# EAGLE board Proiect_OpenBook_Final_PCB (EAGLE 9.7.0)
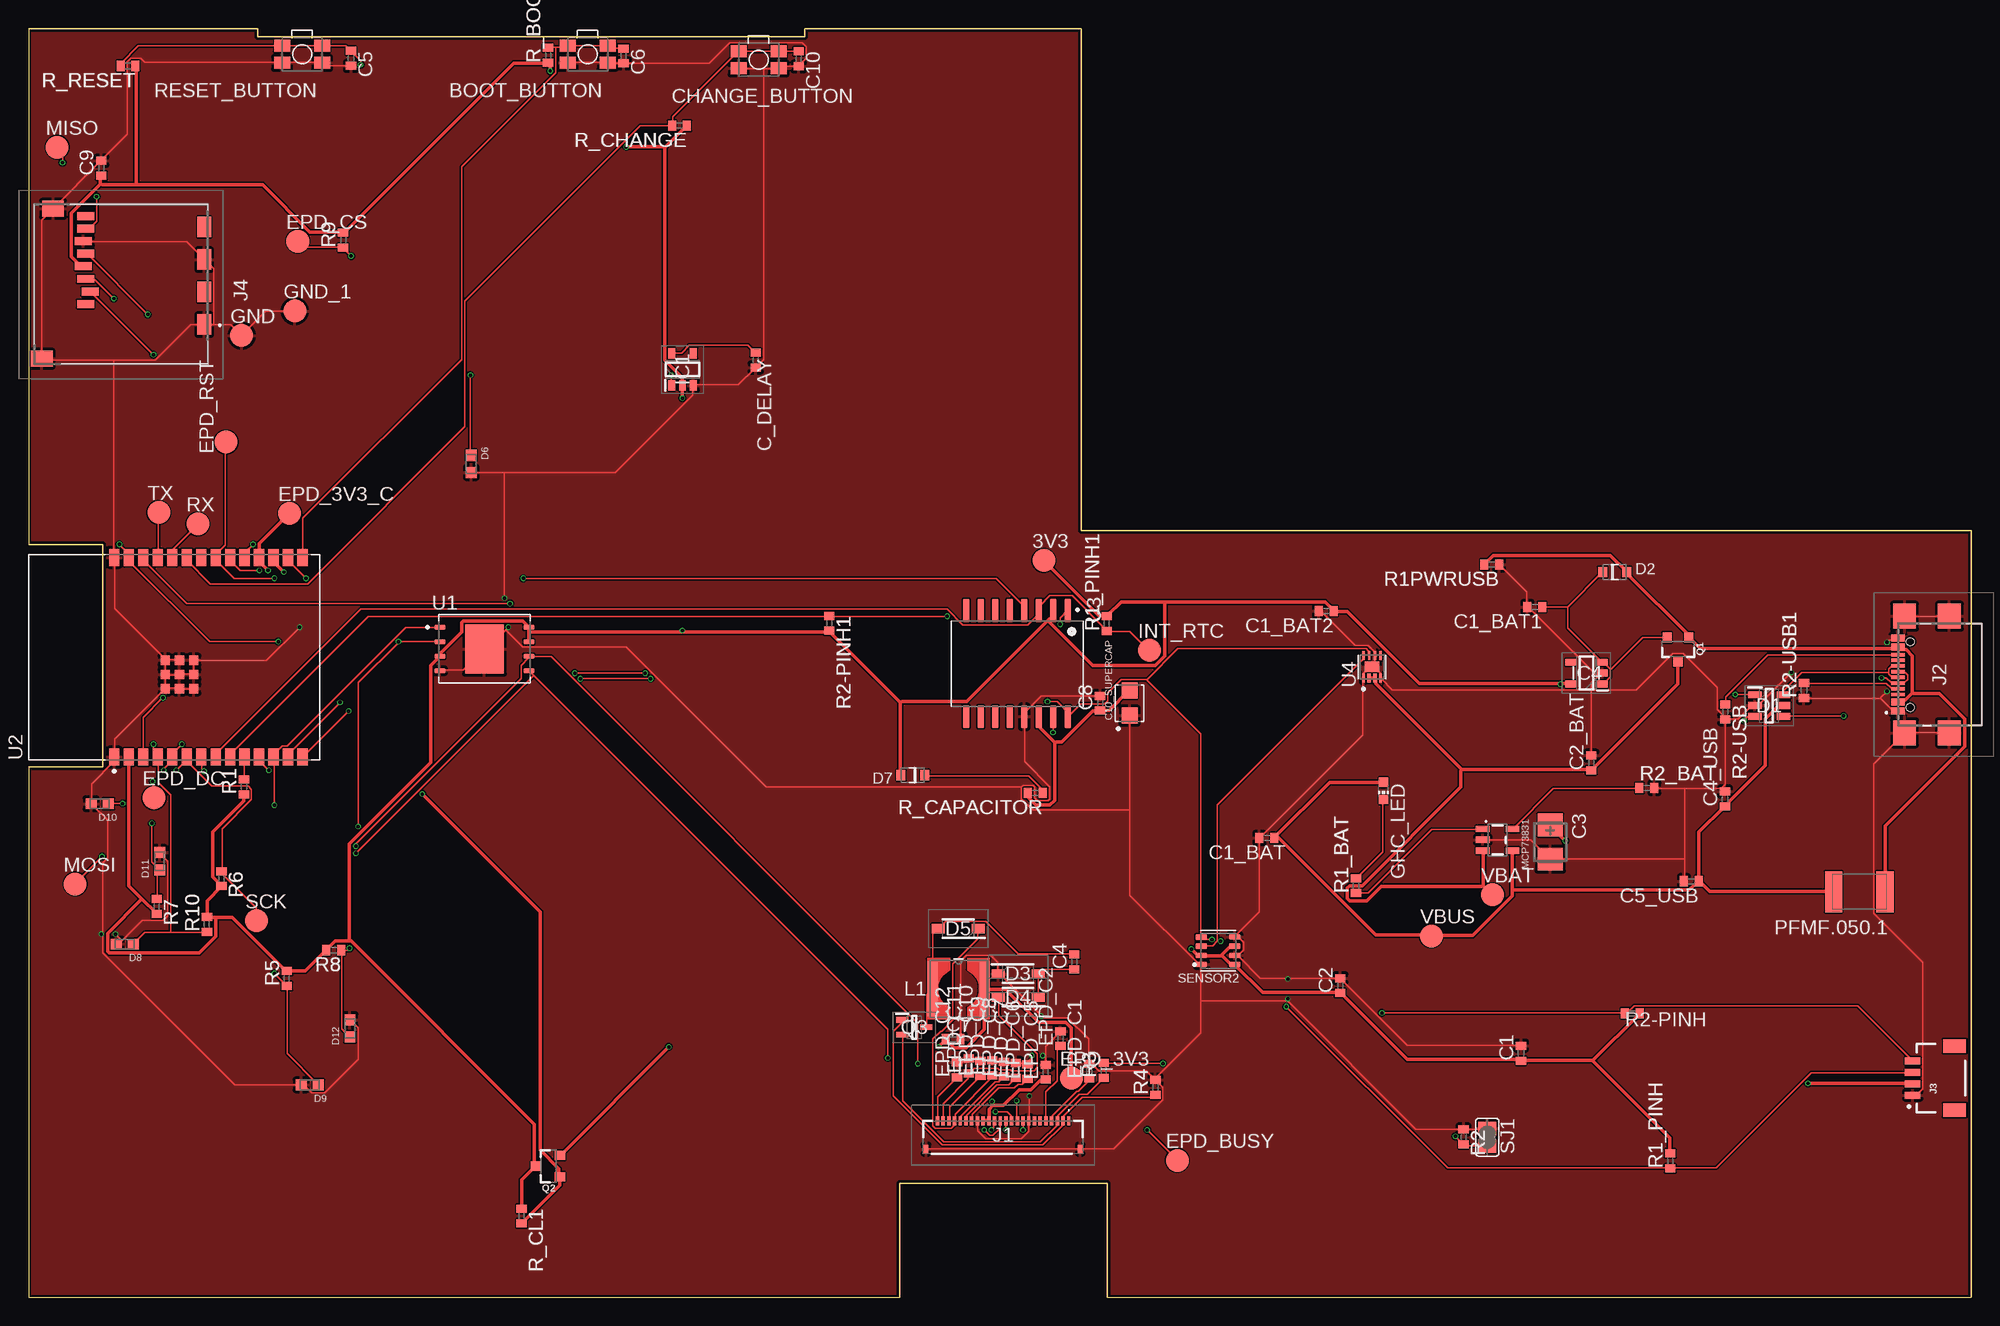
[diagram p0: board, top side]
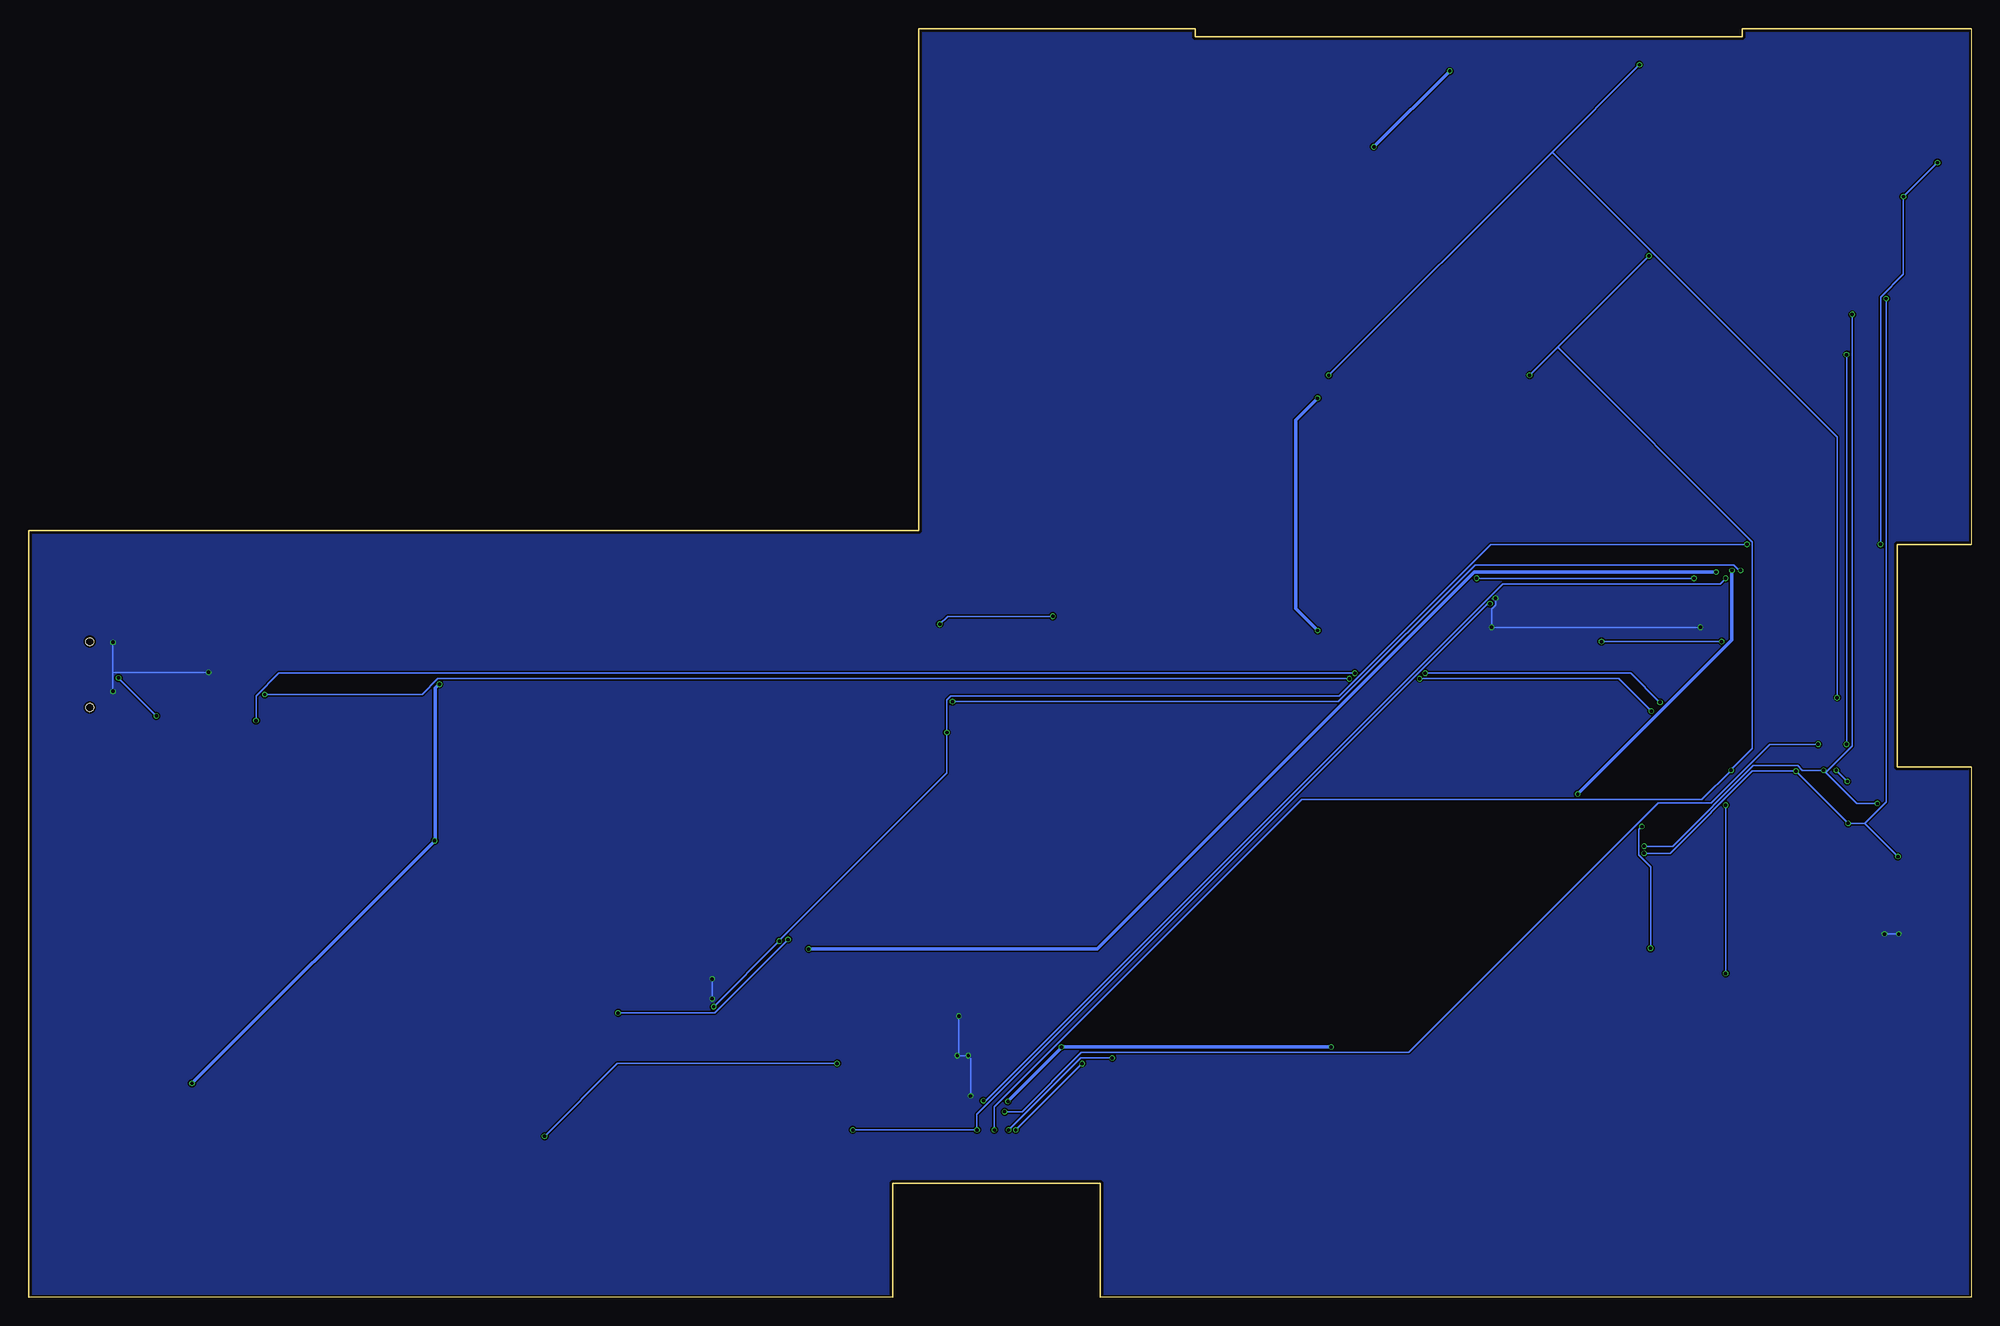
[diagram p1: board, bottom side, seen from below]

Size 170.2 x 111.2 mm. Coordinates in mm from the lower left corner, seen from the top.
Outline: 0,0 76.3,0 76.3,10 94.5,10 94.5,0 170.2,0 170.2,67.2 92.2,67.2 92.2,111.2 68,111.2 68,110.5 20.09,110.5 20.09,111.2 0,111.2 0,66 6.5,66 6.5,46.5 0,46.5 0,0
Copper layers (1*16): Top 0.035mm / dielectric 1.6mm / Bottom 0.035mm
Design rules "jlcpcb-2layers.dru": minimum track width 0.15mm, minimum drill 0.3mm, track to track 5mil, track to pad 5mil, pad to pad 5mil, via to via 5mil, smd to smd 5mil, copper to edge 0.2mm, drill to drill 6mil, minimum pad ring 10mil, minimum via ring 3mil, stop-mask expansion 4mil, vias tented up to drill 0mil, thermal gap 10mil
Net classes: 1 Trasee Putere: width 0.3 mm

## Footprints (pad centres in the part's own frame; a part is rotated, then mirrored left to right if it is on the bottom)
TP20R = smd 2 x 2: TP 0,0
MYBUTTON = smd 1.4 x 1.05: 1 1.75,0.75; 2 -1.75,0.75; 3 -1.75,-0.75; 4 1.75,-0.75
ESP32_WROVER_EAGLE-LTSPICE_C0402 = smd 0.7 x 0.9: 1 -0.65,0; 2 0.65,0
RCL_CT3528 = smd 2 x 2.2: + -1.5,0; - 1.5,0
CAPCP3225X100N = smd 1.4 x 1.4: 1 -1.1,0; 2 1.1,0
SOT95P280X145-6N = smd 1.2 x 0.6: 1 -1.25,0.95; 2 -1.25,0; 3 -1.25,-0.95; 4 1.25,-0.95; 5 1.25,0; 6 1.25,0.95
ESP32_WROVER_AVX---SD0805S020S1R0_AVX_SD0805S020S1R0_0 = smd 0.8 x 0.9: 1 -1.05,0; 2 1.05,0
SOD3716X135N = smd 1.15 x 0.8: 1 -1.75,0; 2 1.75,0
DIOC1608X36N = smd 0.97 x 0.94: 1 -0.75,0; 2 0.75,0
ADAFRUIT_CHIP-LED0603 = smd 0.8 x 0.8: A 0,-0.75; C 0,0.75
SOT95P280X125-5N = smd 0.9 x 0.6: 1 -1.4,0.95; 2 -1.4,0; 3 -1.4,-0.95; 4 1.4,-0.95; 5 1.4,0.95
SOT95P280X120-5N = smd 0.9 x 0.6: 1 -1.4,0.95; 2 -1.4,0; 3 -1.4,-0.95; 4 1.4,-0.95; 5 1.4,0.95
FH34SRJ24S05SH99 = smd 0.3 x 0.8: 1 5.75,1.45; 2 5.25,1.45; 3 4.75,1.45; 4 4.25,1.45; 5 3.75,1.45; 6 3.25,1.45; 7 2.75,1.45; 8 2.25,1.45; 9 1.75,1.45; 10 1.25,1.45; 11 0.75,1.45; 12 0.25,1.45; 13 -0.25,1.45; 14 -0.75,1.45; 15 -1.25,1.45; 16 -1.75,1.45; 17 -2.25,1.45; 18 -2.75,1.45; 19 -3.25,1.45; 20 -3.75,1.45; 21 -4.25,1.45; 22 -4.75,1.45; 23 -5.25,1.45; 24 -5.75,1.45 | smd 0.4 x 0.8: MP1 6.75,-1.05; MP2 -6.75,-1.05
SAMACSYS_PARTS_USB4110GFA = smd 0.3 x 1.15: A1 -3.35,3.678; A4 -2.55,3.678; A5 -1.25,3.678; A6 -0.25,3.678; A7 0.25,3.678; A8 1.25,3.678; A9 2.55,3.678; A12 3.35,3.678; B1 3.05,3.678; B4 2.25,3.678; B5 1.75,3.678; B6 0.75,3.678; B7 -0.75,3.678; B8 -1.75,3.678; B9 -2.25,3.678; B12 -3.05,3.678 | smd 2.18 x 2: MP1 -5.11,-0.827; MP2 5.11,-0.827; MP3 -5.11,3.103; MP4 5.11,3.103 | hole 0.65: -2.89,2.603; 2.89,2.603
JST04_1MM_RA = smd 0.6 x 1.35: 1 -1.5,0; 2 -0.5,0; 3 0.5,0; 4 1.5,0 | smd 1.2 x 2: NC1 2.8,-3.675; NC2 -2.8,-3.675
112ATAARR03ATTEND = smd 1.8 x 1.2: G1 10.6,10.4; G2 4.9,10.4; S1 7.75,10.4; S2 2.05,10.4 | smd 1.4 x 1.9: G3 13.6,-3.85; G4 0.45,-2.85 | smd 0.7 x 1.5: P1 8.8,0; P2 7.7,0.4; P3 6.6,0; P4 5.5,-0.2; P5 4.4,0; P6 3.3,-0.2; P7 2.2,0; P8 1.1,0
IND_4828-WE-TPC_WRE = smd 0.889 x 4.826: 1 -2.286,0; 2 2.286,0
ESP32_WROVER_SPARKFUN-IC-POWER_SOT23-5 = smd 0.55 x 1.2: 1 -0.95,-1.3; 2 0,-1.3; 3 0.95,-1.3; 4 0.95,1.3; 5 -0.95,1.3
ESP32C6_VARISTOR_CT/CN1812 = smd 1.5 x 3.6: 1 -2.25,0; 2 2.25,0
ESP32_WROVER_SPARKFUN-DISCRETESEMI_SOT23-3 = smd 0.8 x 0.9: 1 -0.95,-1; 2 0.95,-1; 3 0,1.1
SOT65P210X110-3N = smd 1.05 x 0.5: 1 -1.05,0.65; 2 -1.05,-0.65; 3 1.05,0
ESP32_WROVER_EAGLE-LTSPICE_R0402 = smd 0.7 x 0.9: 1 -0.65,0; 2 0.65,0
ESP32_WROVER_BME680_PSON80P300X300X100-8N = smd 1.016 x 0.5: 1 1.458,1.2; 2 1.458,0.4; 3 1.458,-0.4; 4 1.458,-1.2; 5 -1.458,-1.22; 6 -1.458,-0.4; 7 -1.458,0.4; 8 -1.458,1.2
SJ = smd 1.168 x 1.6: 1 -0.762,0; 2 0.762,0
SON127P600X800X80-9N = smd 0.94 x 0.44: 1 -3.895,1.905; 2 -3.895,0.635; 3 -3.895,-0.635; 4 -3.895,-1.905; 5 3.895,-1.905; 6 3.895,-0.635; 7 3.895,0.635; 8 3.895,1.905 | smd 3.4 x 4.3: 9 0,0
XCVR_ESP32-C6-WROOM-1-N8 = smd 1.5 x 0.9: 1 -8.75,5.26; 2 -8.75,3.99; 3 -8.75,2.72; 4 -8.75,1.45; 5 -8.75,0.18; 6 -8.75,-1.09; 7 -8.75,-2.36; 8 -8.75,-3.63; 9 -8.75,-4.9; 10 -8.75,-6.17; 11 -8.75,-7.44; 12 -8.75,-8.71; 13 -8.75,-9.98; 14 -8.75,-11.25; 15 8.75,-11.25; 16 8.75,-9.98; 17 8.75,-8.71; 18 8.75,-7.44; 19 8.75,-6.17; 20 8.75,-4.9; 21 8.75,-3.63; 22 8.75,-2.36; 23 8.75,-1.09; 24 8.75,0.18; 25 8.75,1.45; 26 8.75,2.72; 27 8.75,3.99; 28 8.75,5.26 | smd 0.8 x 0.8: 29_1 -2.755,0.79; 29_2 -1.505,0.79; 29_3 -0.255,0.79; 29_4 -2.755,-0.46; 29_5 -1.505,-0.46; 29_6 -0.255,-0.46; 29_7 -2.755,-1.71; 29_8 -1.505,-1.71; 29_9 -0.255,-1.71
SOIC127P1032X265-16N = smd 2.05 x 0.59: 1 -4.655,4.445; 2 -4.655,3.175; 3 -4.655,1.905; 4 -4.655,0.635; 5 -4.655,-0.635; 6 -4.655,-1.905; 7 -4.655,-3.175; 8 -4.655,-4.445; 9 4.655,-4.445; 10 4.655,-3.175; 11 4.655,-1.905; 12 4.655,-0.635; 13 4.655,0.635; 14 4.655,1.905; 15 4.655,3.175; 16 4.655,4.445
SON50P200X200X80-9N = smd 0.76 x 0.27: 1 -0.985,0.75; 4 -0.985,-0.75; 5 0.985,-0.75; 6 0.985,-0.25; 7 0.985,0.25; 8 0.985,0.75 | smd 0.813 x 0.406: 2 -0.985,0.25; 3 -0.985,-0.25 | smd 0.9 x 1.3: 9 0,0

## Placement (x,y rotation side)
3V3  TPTP20R  [TP20R]  88.94,64.58 0 top
BOOT_BUTTON  BUTTON_CUSYOMV1  [MYBUTTON]  48.98,108.95 180 top
C1  100nF  [ESP32_WROVER_EAGLE-LTSPICE_C0402]  130.74,21.41 90 top
C1_BAT  4.7uF  [ESP32_WROVER_EAGLE-LTSPICE_C0402]  108.48,40.26 180 top
C1_BAT1  4.7uF  [ESP32_WROVER_EAGLE-LTSPICE_C0402]  131.95,60.51 180 top
C1_BAT2  4.7uF  [ESP32_WROVER_EAGLE-LTSPICE_C0402]  113.69,60.15 180 top
C2  100nF  [ESP32_WROVER_EAGLE-LTSPICE_C0402]  114.91,27.32 90 top
C2_BAT  4.7uF  [ESP32_WROVER_EAGLE-LTSPICE_C0402]  136.89,46.84 90 top
C3  100uF  [RCL_CT3528]  133.3,39.91 270 top
C4  4.7uF/25V  [ESP32_WROVER_EAGLE-LTSPICE_C0402]  91.61,29.41 90 top
C4_USB  100nF  [ESP32_WROVER_EAGLE-LTSPICE_C0402]  148.61,43.68 90 top
C5  1uF  [ESP32_WROVER_EAGLE-LTSPICE_C0402]  28.25,108.58 270 top
C5_USB  4.7uF  [ESP32_WROVER_EAGLE-LTSPICE_C0402]  145.67,36.47 180 top
C6  100nF  [ESP32_WROVER_EAGLE-LTSPICE_C0402]  52.13,108.8 270 top
C7  10uF  [ESP32_WROVER_EAGLE-LTSPICE_C0402]  80.99,22.63 0 top
C8  100nF  [ESP32_WROVER_EAGLE-LTSPICE_C0402]  93.87,52.08 90 top
C9  100nF  [ESP32_WROVER_EAGLE-LTSPICE_C0402]  6.37,98.96 90 top
C10  100nF  [ESP32_WROVER_EAGLE-LTSPICE_C0402]  67.46,108.54 270 top
C10_SUPERCAP  CPH3225A  [CAPCP3225X100N]  96.46,52.09 90 top
C_DELAY  100nF  [ESP32_WROVER_EAGLE-LTSPICE_C0402]  63.7,82.14 270 top
CHANGE_BUTTON  BUTTON_CUSYOMV1  [MYBUTTON]  63.96,108.45 180 top
D1  USBLC6-2SC6Y  [SOT95P280X145-6N]  152.48,51.87 0 top
D2  ESP32_WROVER_AVX---SD0805S020S1R0_AVX_SD0805S020S1R0_0_0AVX_SD0805S020S1R0_0_0  [ESP32_WROVER_AVX---SD0805S020S1R0_AVX_SD0805S020S1R0_0]  138.94,63.57 0 top
D3  MBR0530  [SOD3716X135N]  86.69,28.37 0 top
D4  MBR0530  [SOD3716X135N]  86.69,26.32 180 top
D5  MBR0530  [SOD3716X135N]  81.44,32.32 180 top
D6  PGB1010603MR  [DIOC1608X36N]  38.78,73.05 270 top
D7  ESP32_WROVER_AVX---SD0805S020S1R0_AVX_SD0805S020S1R0_0_0AVX_SD0805S020S1R0_0_0  [ESP32_WROVER_AVX---SD0805S020S1R0_AVX_SD0805S020S1R0_0]  77.47,45.77 180 top
D8  PGB1010603MR  [DIOC1608X36N]  8.44,30.97 180 top
D9  PGB1010603MR  [DIOC1608X36N]  24.64,18.63 180 top
D10  PGB1010603MR  [DIOC1608X36N]  6.24,43.27 180 top
D11  PGB1010603MR  [DIOC1608X36N]  11.49,38.23 90 top
D12  PGB1010603MR  [DIOC1608X36N]  28.16,23.58 90 top
EPD_3V3  TPTP20R  [TP20R]  91.35,19.21 0 top
EPD_3V3_C  TPTP20R  [TP20R]  22.88,68.71 0 top
EPD_BUSY  TPTP20R  [TP20R]  100.63,12.01 0 top
EPD_C1  1uF/50V  [ESP32_WROVER_EAGLE-LTSPICE_C0402]  92.92,19.84 90 top
EPD_C2  1uF/50V  [ESP32_WROVER_EAGLE-LTSPICE_C0402]  90.4,22.68 90 top
EPD_C5  0.1uF/50V  [ESP32_WROVER_EAGLE-LTSPICE_C0402]  89.11,19.75 90 top
EPD_C6  1uF/50V  [ESP32_WROVER_EAGLE-LTSPICE_C0402]  87.5,19.79 90 top
EPD_C7  1uF/50V  [ESP32_WROVER_EAGLE-LTSPICE_C0402]  86.48,19.9 90 top
EPD_C8  1uF/50V  [ESP32_WROVER_EAGLE-LTSPICE_C0402]  85.45,20.01 90 top
EPD_C9  1uF/50V  [ESP32_WROVER_EAGLE-LTSPICE_C0402]  84.42,20.12 90 top
EPD_C10  1uF/50V  [ESP32_WROVER_EAGLE-LTSPICE_C0402]  83.39,20.07 90 top
EPD_C11  1uF/50V  [ESP32_WROVER_EAGLE-LTSPICE_C0402]  82.36,20.29 90 top
EPD_C12  1uF/50V  [ESP32_WROVER_EAGLE-LTSPICE_C0402]  81.34,19.95 90 top
EPD_CS  TPTP20R  [TP20R]  23.58,92.55 0 top
EPD_DC  TPTP20R  [TP20R]  10.99,43.79 0 top
EPD_RST  TPTP20R  [TP20R]  17.3,74.97 90 top
GHC_LED  [ADAFRUIT_CHIP-LED0603]  118.69,44.41 180 top
GND  TPTP20R  [TP20R]  18.67,84.29 0 top
GND_1  TPTP20R  [TP20R]  23.33,86.45 0 top
IC1  BD5229G-TR  [SOT95P280X125-5N]  57.29,81.33 90 top
IC4  XC6220A331MR-G  [SOT95P280X120-5N]  136.47,54.71 180 top
INT_RTC  TPTP20R  [TP20R]  98.18,56.71 0 top
J1  FH34SRJ-24S-0.5SH_99_  [FH34SRJ24S05SH99]  85.37,14.04 0 top
J2  SAMACSYS_PARTS_USB4110-GF-A  [SAMACSYS_PARTS_USB4110GFA]  167.44,54.59 90 top
J3  QWIIC_RIGHT_ANGLE  [JST04_1MM_RA]  165.04,19.22 90 top
J4  112A-TAAR-R03_ATTEND  [112ATAARR03ATTEND]  5,95.86 270 top
L1  68uH  [IND_4828-WE-TPC_WRE]  81.47,27.05 0 top
MCP73831  ESP32_WROVER_SPARKFUN-IC-POWER_MCP73831  [ESP32_WROVER_SPARKFUN-IC-POWER_SOT23-5]  128.69,40.11 270 top
MISO  TPTP20R  [TP20R]  2.51,100.79 0 top
MOSI  TPTP20R  [TP20R]  4.07,36.22 0 top
PFMF.050.1  ESP32C6_VARISTORCN1812  [ESP32C6_VARISTOR_CT/CN1812]  160.38,35.55 180 top
Q1  20V/4.2A/52mΩ/1.4W  [ESP32_WROVER_SPARKFUN-DISCRETESEMI_SOT23-3]  144.5,56.83 180 top
Q2  20V/4.2A/52mΩ/1.4W  [ESP32_WROVER_SPARKFUN-DISCRETESEMI_SOT23-3]  45.55,11.51 90 top
Q3  SI1308EDL-T1-GE3  [SOT65P210X110-3N]  77.59,23.68 0 top
R1  10K  [ESP32_WROVER_EAGLE-LTSPICE_R0402]  18.87,44.75 90 top
R1_BAT  200  [ESP32_WROVER_EAGLE-LTSPICE_R0402]  116.28,36.08 90 top
R1_PINH  10K  [ESP32_WROVER_EAGLE-LTSPICE_R0402]  143.81,11.97 90 top
R1_PINH1  10K  [ESP32_WROVER_EAGLE-LTSPICE_R0402]  94.46,59.06 90 top
R1PWRUSB  100K  [ESP32_WROVER_EAGLE-LTSPICE_R0402]  128.17,64.23 180 top
R2  2.2  [ESP32_WROVER_EAGLE-LTSPICE_R0402]  125.71,14.07 270 top
R2-PINH  10K  [ESP32_WROVER_EAGLE-LTSPICE_R0402]  140.49,24.9 0 top
R2-PINH1  10K  [ESP32_WROVER_EAGLE-LTSPICE_R0402]  70.14,59.08 270 top
R2-USB  5k1  [ESP32_WROVER_EAGLE-LTSPICE_R0402]  148.63,51.32 270 top
R2-USB1  5k1  [ESP32_WROVER_EAGLE-LTSPICE_R0402]  155.53,53.2 90 top
R2_BAT  2K  [ESP32_WROVER_EAGLE-LTSPICE_R0402]  141.77,44.65 0 top
R3  0.47  [ESP32_WROVER_EAGLE-LTSPICE_R0402]  94.18,19.91 90 top
R4  10K  [ESP32_WROVER_EAGLE-LTSPICE_R0402]  98.72,18.41 90 top
R5  10K  [ESP32_WROVER_EAGLE-LTSPICE_R0402]  22.62,27.95 90 top
R6  10K  [ESP32_WROVER_EAGLE-LTSPICE_R0402]  16.9,36.7 270 top
R7  10K  [ESP32_WROVER_EAGLE-LTSPICE_R0402]  11.23,34.26 270 top
R8  10K  [ESP32_WROVER_EAGLE-LTSPICE_R0402]  26.74,30.44 180 top
R9  10K  [ESP32_WROVER_EAGLE-LTSPICE_R0402]  27.56,92.65 90 top
R10  10K  [ESP32_WROVER_EAGLE-LTSPICE_R0402]  15.63,32.7 90 top
R_BOOT  10K  [ESP32_WROVER_EAGLE-LTSPICE_R0402]  45.51,108.85 90 top
R_CAPACITOR  15  [ESP32_WROVER_EAGLE-LTSPICE_R0402]  88.2,44.21 180 top
R_CHANGE  10K  [ESP32_WROVER_EAGLE-LTSPICE_R0402]  57.03,102.68 180 top
R_CL1  10K  [ESP32_WROVER_EAGLE-LTSPICE_R0402]  43.19,7.14 270 top
R_RESET  10K  [ESP32_WROVER_EAGLE-LTSPICE_R0402]  8.72,107.92 180 top
RESET_BUTTON  BUTTON_CUSYOMV1  [MYBUTTON]  23.97,108.95 180 top
RX  TPTP20R  [TP20R]  14.83,67.79 0 top
SCK  TPTP20R  [TP20R]  19.99,33 0 top
SENSOR2  ESP32_WROVER_BME680_BME680  [ESP32_WROVER_BME680_PSON80P300X300X100-8N]  104.2,30.38 180 top
SJ1  [SJ]  127.79,14.04 270 top
TX  TPTP20R  [TP20R]  11.41,68.79 0 top
U1  W25Q512JVEIQ  [SON127P600X800X80-9N]  39.94,56.83 0 top
U2  ESP32-C6-WROOM-1-N8  [XCVR_ESP32-C6-WROOM-1-N8]  12.76,56.1 90 top
U3  DS3231SN#  [SOIC127P1032X265-16N]  86.6,55.55 270 top
U4  MAX17048G+T10  [SON50P200X200X80-9N]  117.69,55.27 90 top
VBAT  TPTP20R  [TP20R]  128.25,35.29 0 top
VBUS  TPTP20R  [TP20R]  122.9,31.68 0 top

## Library data of the parts
3V3 BOOT_BUTTON CHANGE_BUTTON EPD_3V3 EPD_3V3_C EPD_BUSY EPD_CS EPD_DC EPD_RST GHC_LED GND GND_1 INT_RTC MISO MOSI PFMF.050.1 RESET_BUTTON RX SCK SJ1 TX VBAT VBUS = DeskAssistant v19 v1
C1 C1_BAT C1_BAT1 C1_BAT2 C2 C2_BAT C4 C4_USB C5 C5_USB C6-C10 C_DELAY EPD_C1 EPD_C2 EPD_C5-EPD_C12 = DeskAssistant v19 v1; SPICEMODEL: NONE; SPICEPREFIX: C
C3 = DeskAssistant v19 v1; SPICEPREFIX: C
C10_SUPERCAP = DeskAssistant v19 v1; AVAILABILITY: Not in stock; CHECK_PRICES: https://www.snapeda.com/parts/CPH3225A/Seiko+Instruments/view-part/?ref=eda; DESCRIPTION: 11 mF (EDLC) Supercapacitor 3.3 V 1210 (3225 Metric) - -; MF: Seiko Instruments; MP: CPH3225A; PACKAGE: 1210 Seiko; PRICE: None; PURCHASE-URL: https://www.snapeda.com/api/url_track_click_mouser/?unipart_id=562593&manufacturer=Seiko Instruments&part_name=CPH3225A&search_term=None; SNAPEDA_LINK: https://www.snapeda.com/parts/CPH3225A/Seiko+Instruments/view-part/?ref=snap
D1 = DeskAssistant v19 v1; AVAILABILITY: In Stock; CHECK_PRICES: https://www.snapeda.com/parts/USBLC6-2SC6Y/STMicroelectronics/view-part/?ref=eda; DESCRIPTION: 17V Clamp 5A (8/20µs) Ipp Tvs Diode Surface Mount SOT-23-6; MF: STMicroelectronics; MP: USBLC6-2SC6Y; PACKAGE: SOT-23-6 STMicroelectronics; PRICE: None; SNAPEDA_LINK: https://www.snapeda.com/parts/USBLC6-2SC6Y/STMicroelectronics/view-part/?ref=snap
D2 D7 = DeskAssistant v19 v1; CENTROID_NOT_SPECIFIED: No; DATASHEET: http://datasheets.avx.com/schottky.pdf; DIGIKEY_DESCRIPTION: DIODE SCHOTTKY 20V 1A 0805; DIGIKEY_PART_NUMBER: 478-7800-1-ND; LEAD_FREE: yes; MF: AVX; MOUSER_PART_NUMBER: 581-SD0805S020S1R0; PACKAGE: 0805 (2012 metric); PREFIX: D; ROHS: yes; TEMPERATURE_RANGE_HIGH: +125°C; TEMPERATURE_RANGE_LOW: -55°C
D3-D5 = DeskAssistant v19 v1; AVAILABILITY: In Stock; CHECK_PRICES: https://www.snapeda.com/parts/MBR0530/Onsemi/view-part/?ref=eda; DESCRIPTION: Diode Schottky 30 V 500mA Surface Mount SOD-123; MF: ON Semiconductor; MP: MBR0530; PACKAGE: SOD-123-2 ON Semiconductor; PRICE: None; PURCHASE-URL: https://www.snapeda.com/api/url_track_click_mouser/?unipart_id=179458&manufacturer=ON Semiconductor&part_name=MBR0530&search_term=None; SNAPEDA_LINK: https://www.snapeda.com/parts/MBR0530/Onsemi/view-part/?ref=snap
D6 D8-D12 = DeskAssistant v19 v1; AVAILABILITY: In Stock; CHECK_PRICES: https://www.snapeda.com/parts/PGB1010603MR/Littelfuse/view-part/?ref=eda; DESCRIPTION: 150V (Typ) Clamp - Ipp Tvs Diode Surface Mount 0603 (1608 Metric); MF: Littelfuse Inc.; MP: PGB1010603MR; PACKAGE: 0603 Littelfuse Inc.; PRICE: None; PURCHASE-URL: https://www.snapeda.com/api/url_track_click_mouser/?unipart_id=5659453&manufacturer=Littelfuse Inc.&part_name=PGB1010603MR&search_term=None; SNAPEDA_LINK: https://www.snapeda.com/parts/PGB1010603MR/Littelfuse/view-part/?ref=snap
IC1 = DeskAssistant v19 v1; DESCRIPTION: Voltage Detector with Adjustable Delay Time: CMOS processes are utilized to develop high precision, low current consumption CMOS reset ICs that allow arbitrary setting of the delay time. The extensive lineup includes both Nch Open Drain and CMOS output types in a wide range of detection voltages (from 2.3V to 6.0V, in 0.1V steps), enabling selection of the ideal solution based on customer requirements. In addition, the entire series is of course both lead-free and RoHS-compliant.; HEIGHT: 1.25mm; MANUFACTURER_NAME: ROHM Semiconductor; MANUFACTURER_PART_NUMBER: BD5229G-TR; MOUSER_PART_NUMBER: 755-BD5229G-TR; MOUSER_PRICE-STOCK: https://www.mouser.co.uk/ProductDetail/ROHM-Semiconductor/BD5229G-TR?qs=4kLU8WoGk0vvnhrrYwdszw%3D%3D
IC4 = DeskAssistant v19 v1; DESCRIPTION: LDO Voltage Regulators; HEIGHT: 1.2mm; MANUFACTURER_NAME: Torex; MANUFACTURER_PART_NUMBER: XC6220A331MR-G; MOUSER_PART_NUMBER: 865-XC6220A331MR-G; MOUSER_PRICE-STOCK: https://www.mouser.co.uk/ProductDetail/Torex-Semiconductor/XC6220A331MR-G?qs=AsjdqWjXhJ8ZSWznL1J0gg%3D%3D
J1 = DeskAssistant v19 v1; DESCRIPTION: 24 Position FFC, FPC Connector Contacts, Top and Bottom 0.020" (0.50mm) Surface Mount, Right Angle; HEIGHT: 1.1mm; MANUFACTURER_NAME: Hirose; MANUFACTURER_PART_NUMBER: FH34SRJ-24S-0.5SH(99); MOUSER_PART_NUMBER: 798-FH34SRJ24S05SH99; MOUSER_PRICE-STOCK: https://www.mouser.co.uk/ProductDetail/Hirose-Connector/FH34SRJ-24S-0.5SH99?qs=vcbW%252B4%252BSTIpKBl5ap9J8Fw%3D%3D
J2 = DeskAssistant v19 v1; DESCRIPTION: CONN USB 2.0 TYPE-C R/A SMT; HEIGHT: 3.26mm; MANUFACTURER_NAME: GCT (GLOBAL CONNECTOR TECHNOLOGY); MANUFACTURER_PART_NUMBER: USB4110-GF-A; MOUSER_PART_NUMBER: 640-USB4110-GF-A; MOUSER_PRICE-STOCK: https://www.mouser.co.uk/ProductDetail/GCT/USB4110-GF-A?qs=KUoIvG%2F9IlYiZvIXQjyJeA%3D%3D
J3 = DeskAssistant v19 v1; PROD_ID: CONN-13694
J4 = DeskAssistant v19 v1; DESCRIPTION: Micro SD Card Socket, Push-Push Type, Top Mount, SMT, H=1.83mm, 10u; HEIGHT: 1.9mm; MANUFACTURER_NAME: ATTEND; MANUFACTURER_PART_NUMBER: 112A-TAAR-R03 ATTEND
L1 = DeskAssistant v19 v1; COPYRIGHT: Copyright (C) 2024 Ultra Librarian. All rights reserved.; MANUFACTURER_PART_NUMBER: 744043680; MFR_NAME: Wurth Electronics
MCP73831 = DeskAssistant v19 v1; PROD_ID: IC-09995
Q1 Q2 = DeskAssistant v19 v1; PROD_ID: TRAN-14388
Q3 = DeskAssistant v19 v1; AVAILABILITY: In Stock; CHECK_PRICES: https://www.snapeda.com/parts/SI1308EDL-T1-GE3/Vishay+Siliconix/view-part/?ref=eda; DESCRIPTION: Si1308EDL-T1-GE3 N-channel MOSFET Transistor, 1.5 A, 30 V, 3-Pin SC-70 | Siliconix / Vishay SI1308EDL-T1-GE3; MF: Vishay Siliconix; MP: SI1308EDL-T1-GE3; PACKAGE: SOT-323 Vishay Semiconductor; PRICE: None; PURCHASE-URL: https://www.snapeda.com/api/url_track_click_mouser/?unipart_id=274603&manufacturer=Vishay Siliconix&part_name=SI1308EDL-T1-GE3&search_term=None; SNAPEDA_LINK: https://www.snapeda.com/parts/SI1308EDL-T1-GE3/Vishay+Siliconix/view-part/?ref=snap
R1 R1_BAT R1_PINH R1_PINH1 R1PWRUSB R2 R2-PINH R2-PINH1 R2-USB R2-USB1 R2_BAT R3-R10 R_BOOT R_CAPACITOR R_CHANGE R_CL1 R_RESET = DeskAssistant v19 v1; SPICEMODEL: NONE; SPICEPREFIX: R
SENSOR2 = DeskAssistant v19 v1; AVAILABILITY: Unavailable; DESCRIPTION: Integrated Environmental Unit; MF: Bosch Sensortec; MP: BME680; PACKAGE: LGA-8 Bosch Tools; PRICE: None
U1 = DeskAssistant v19 v1; AVAILABILITY: In Stock; CHECK_PRICES: https://www.snapeda.com/parts/W25Q512JVEIQ/Winbond+Electronics/view-part/?ref=eda; DESCRIPTION: FLASH - NOR Memory IC 512Mb (64M x 8) SPI - Quad I/O 133 MHz 8-WSON (8x6); MF: Winbond Electronics; MP: W25Q512JVEIQ; PACKAGE: Package; PRICE: None; SNAPEDA_LINK: https://www.snapeda.com/parts/W25Q512JVEIQ/Winbond+Electronics/view-part/?ref=snap
U2 = DeskAssistant v19 v1; AVAILABILITY: In Stock; CHECK_PRICES: https://www.snapeda.com/parts/ESP32-C6-WROOM-1-N8/Espressif+Systems/view-part/?ref=eda; DESCRIPTION: Multiprotocol Modules ESP32-C6 module, Wi-Fi 6 in 2.4 GHz band, Bluetooth 5, Zigbee 3.0 and Thread. ESP34-WROOM Compatible - ENGINEERING SAMPLE; MF: Espressif Systems; MP: ESP32-C6-WROOM-1-N8; PACKAGE: None; PRICE: None; SNAPEDA_LINK: https://www.snapeda.com/parts/ESP32-C6-WROOM-1-N8/Espressif+Systems/view-part/?ref=snap
U3 = DeskAssistant v19 v1; AVAILABILITY: In Stock; CHECK_PRICES: https://www.snapeda.com/parts/DS3231SN%23/Analog+Devices/view-part/?ref=eda; DESCRIPTION: Extremely Accurate I²C-Integrated RTC/TCXO/Crystal; MF: Analog Devices; MP: DS3231SN#; PACKAGE: SOIC-16 Maxim; PRICE: None; PURCHASE-URL: https://www.snapeda.com/api/url_track_click_mouser/?unipart_id=99048&manufacturer=Analog Devices&part_name=DS3231SN#&search_term=None; SNAPEDA_LINK: https://www.snapeda.com/parts/DS3231SN%23/Analog+Devices/view-part/?ref=snap
U4 = DeskAssistant v19 v1; AVAILABILITY: In Stock; CHECK_PRICES: https://www.snapeda.com/parts/MAX17048G+T10/Analog+Devices/view-part/?ref=eda; DESCRIPTION: 3µA 1-Cell/2-Cell Fuel Gauge with ModelGauge; MF: Analog Devices; MP: MAX17048G+T10; PACKAGE: TDFN-8 Maxim; PRICE: None; PURCHASE-URL: https://www.snapeda.com/api/url_track_click_mouser/?unipart_id=329239&manufacturer=Analog Devices&part_name=MAX17048G+T10&search_term=None; SNAPEDA_LINK: https://www.snapeda.com/parts/MAX17048G+T10/Analog+Devices/view-part/?ref=snap

## Nets
3V3 [Trasee Putere]: 3V3.TP C1_BAT2.1 C3.+ C9.1 D7.2 IC1.2 IC4.5 J3.2 J4.P4 Q2.3 R1.1 R1_PINH1.2 R2-PINH1.2 R5.2 R6.2 R7.2 R8.2 R9.2 R10.2 R_BOOT.1 R_CHANGE.1 R_CL1.1 R_RESET.1 U1.3 U1.7 U1.8 U2.2 U3.2
32KHZ: R2-PINH1.1 U2.9 U3.1
DN: D1.4 J2.A7 J2.B7
DP: D1.6 J2.A6 J2.B6
EPD_3V3 [Trasee Putere]: C7.1 EPD_3V3.TP EPD_C5.1 J1.15 J1.16 L1.2 Q2.2
EPD_3V3_C [Trasee Putere]: EPD_3V3_C.TP Q2.1 R_CL1.2 U2.18
EPD_BUSY: EPD_BUSY.TP J1.9 U2.26
EPD_CS: D6.1 EPD_CS.TP J1.12 R9.1 U2.11
EPD_DC: EPD_DC.TP J1.11 U2.5
EPD_RST: EPD_RST.TP J1.10 U2.21
FLASH_CS: D9.1 R5.1 U1.1 U2.12
GDR: J1.2 Q3.1 R4.1
GND: BOOT_BUTTON.1 BOOT_BUTTON.2 C1.2 C1_BAT1.2 C1_BAT2.2 C1_BAT.2 C2.2 C2_BAT.2 C3.- C4_USB.2 C5.2 C5_USB.2 C6.2 C7.2 C8.2 C9.2 C10.2 C10_SUPERCAP.1 C_DELAY.2 CHANGE_BUTTON.1 CHANGE_BUTTON.2 D1.2 D3.1 D6.2 D8.2 D9.2 D10.2 D11.2 D12.2 EPD_C1.2 EPD_C2.2 EPD_C5.2 EPD_C6.2 EPD_C7.2 EPD_C8.2 EPD_C9.2 EPD_C10.2 EPD_C11.2 EPD_C12.2 GND.TP GND_1.TP IC1.3 IC4.2 J1.8 J1.17 J1.MP1 J1.MP2 J2.A1 J2.A12 J2.B1 J2.B12 J2.MP1 J2.MP2 J2.MP3 J2.MP4 J3.1 J4.G1 J4.G2 J4.G3 J4.G4 J4.P6 MCP73831.2 R1PWRUSB.1 R2-USB1.1 R2-USB.2 R2.1 R2_BAT.2 R4.2 RESET_BUTTON.1 RESET_BUTTON.2 SENSOR2.1 SENSOR2.5 SENSOR2.7 SJ1.1 U1.4 U1.9 U2.1 U2.28 U2.29_1 U2.29_2 U2.29_3 U2.29_4 U2.29_5 U2.29_6 U2.29_7 U2.29_8 U2.29_9 U3.13 U4.1 U4.4 U4.6 U4.9
GPIO8: R1.2 U2.10
I2C_PW [Trasee Putere]: C1.1 C2.1 R1_PINH.2 R2-PINH.2 SENSOR2.2 SENSOR2.6 SENSOR2.8 U2.17
INT_RTC: INT_RTC.TP R1_PINH1.1 U2.8 U3.3
IO/BOOT: BOOT_BUTTON.3 BOOT_BUTTON.4 C6.1 R_BOOT.2 U2.15
IO/CHANGE: C10.1 CHANGE_BUTTON.3 CHANGE_BUTTON.4 R_CHANGE.2 U2.23
MISO: D12.1 J4.P7 MISO.TP R8.1 U1.2 U2.27
MOSI: D11.1 J1.14 J4.P3 MOSI.TP R7.1 U1.5 U2.7
N$2: J2.B5 R2-USB.1
N$3: J2.A5 R2-USB1.2
N$4: C1_BAT1.1 D2.1 IC4.1 IC4.3 Q1.2
N$5: EPD_C12.1 J1.24
N$6: GHC_LED.C R1_BAT.2
N$7: C4.1 D3.2 D4.1
N$9: MCP73831.1 R1_BAT.1
N$10: MCP73831.5 R2_BAT.1
N$11: C_DELAY.1 IC1.5
N$12: EPD_C10.1 J1.22
N$14: EPD_C8.1 J1.20
N$15: EPD_C7.1 J1.19
N$16: EPD_C6.1 J1.18
N$18: EPD_C1.1 J1.4
N$19: EPD_C2.1 J1.5
N$24: D7.1 R_CAPACITOR.1
PREVGH: D5.1 EPD_C9.1 J1.21
PREVGL: D4.2 EPD_C11.1 J1.23
RESE: J1.3 Q3.2 R3.1
RESE': R2.2 R3.2 SJ1.2
RESET: C5.1 IC1.1 R_RESET.2 RESET_BUTTON.3 RESET_BUTTON.4 U2.3
RTC_RST: U2.16 U3.4
RX: RX.TP U2.24
SCK: D10.1 J1.13 J4.P5 R6.1 SCK.TP U1.6 U2.6
SCL: J3.4 R2-PINH.1 SENSOR2.4 U2.20 U3.16 U4.7
SDA: J3.3 R1_PINH.1 SENSOR2.3 U2.19 U3.15 U4.8
SRC: C4.2 D5.2 L1.1 Q3.3
SS_SD: D8.1 J4.P2 R10.1 U2.4
TX: TX.TP U2.25
USB_D+: D1.1 U2.14
USB_D-: D1.3 U2.13
VBAT [Trasee Putere]: C2_BAT.1 MCP73831.3 Q1.3 U4.2 U4.3 VBAT.TP
VBUS [Trasee Putere]: C1_BAT.1 C4_USB.1 C5_USB.1 D1.5 GHC_LED.A MCP73831.4 PFMF.050.1.2 VBUS.TP
VRTC [Trasee Putere]: C8.1 C10_SUPERCAP.2 R_CAPACITOR.2 U3.14
VUSB [Trasee Putere]: D2.2 J2.A4 J2.A9 J2.B4 J2.B9 PFMF.050.1.1 Q1.1 R1PWRUSB.2

## Tracks (layer width: path | path; a pad name or v marks a point on that pad's centre or on a via)
3V3  (via drill 0.3)
  Top 0.3: 55.75,100.76 55.75,82.13 57.27,80.61 57.27,79.98 IC1.2 57.27,79.78 v57.27,78.81 | 55.75,100.76 57.62,102.63 R_CHANGE.1 | 6.3,97.57 6.3,98.27 C9.1 | 6.3,97.57 3.74,95.01 3.74,91.2 4.57,90.37 4.78,90.37 J4.P4 | 9.42,97.5 6.44,97.5 6.3,97.57 | 9.42,97.5 20.5,97.5 24.65,93.35 27.49,93.35 R9.2 27.7,93.35 42.52,108.17 45.5,108.17 R_BOOT.1 45.57,108.03 45.7,107.89 v45.7,107.48 | 9.42,97.5 9.42,107.89 R_RESET.1 | v52.35,100.83 55.61,100.83 55.75,100.76 | 9.94,34.94 8.79,36.08 8.79,47.3 U2.2 | 9.94,34.94 11.22,33.66 R7.2 | R1.1 18.84,44.04 18.84,43.49 16.14,40.79 16.14,36.84 16.83,36.15 R6.2 16.9,36.01 15.65,34.76 15.65,33.38 R10.2 15.79,33.31 16.41,33.31 | R_CL1.1 43.21,7.83 43.21,10.32 44.39,11.49 Q2.3 44.32,11.63 44.32,15.17 28.25,31.23 28.12,31.23 | 28.12,31.23 26.87,31.23 26.18,30.54 R8.2 26.04,30.4 24.24,28.6 22.64,28.6 R5.2 22.51,28.67 17.87,33.31 16.41,33.31 | 9.94,34.94 6.92,31.92 6.92,30.33 7.06,30.19 14.96,30.19 16.41,31.65 16.41,33.31 | 43.84,58.31 43.84,58.59 U1.8 43.77,58.79 43.28,59.28 38.09,59.28 37.95,59.14 37.95,58.31 36.08,56.44 36.08,56.23 U1.3 35.94,56.09 35.25,55.4 35.25,46.88 28.12,39.75 28.12,31.23 | 43.84,58.31 43.84,57.48 U1.7 | 76.38,52.15 76.38,45.77 D7.2 | 76.38,52.15 70.15,58.38 R2-PINH1.2 70.01,58.31 57.27,58.31 | 89.3,59.31 82.2,52.22 76.52,52.22 76.38,52.15 | 89.3,59.31 89.75,59.76 89.75,60.18 U3.2 | 57.27,58.31 43.84,58.31 | v155.88,18.77 165.02,18.77 J3.2 | v134.62,40.03 133.31,41.34 C3.+ | 3V3.TP 88.99,64.54 93.76,59.76 94.46,59.76 R1_PINH1.2 94.6,59.83 95.7,60.94 99.51,60.94 | 99.51,60.94 113.57,60.94 114.33,60.18 C1_BAT2.1 114.47,60.11 115.51,60.11 121.81,53.81 134.21,53.81
  Top 0.3: 134.21,53.81 135.04,53.81 IC4.5 | v134.21,53.74 134.21,53.81 | 89.3,59.31 93.21,55.4 98.68,55.4 99.51,56.23 99.51,60.94 | v57.27,58.45 57.27,58.31
  Bottom 0.3: v45.7,107.48 v52.35,100.83 | v155.88,18.77 v134.62,40.03 134.55,40.16 134.55,53.39 v134.21,53.74 | v57.27,58.45 59.2,60.37 59.2,76.88 v57.27,78.81
32KHZ  (via drill 0.3)
  Top 0.15: v80.47,59.69 70.15,59.69 R2-PINH1.1 70.08,59.69 29.78,59.69 17.73,47.64 17.73,47.37 U2.9 | v90.37,59 90.37,59.55 91,60.18 U3.1
  Bottom 0.15: v80.47,59.69 89.68,59.69 v90.37,59
DN  (via drill 0.3)
  Top 0.15: J2.A7 163.78,54.78 164.4,54.78 164.61,54.57 164.61,54.15 164.33,53.88 163.78,53.88 J2.B7 163.71,53.88 163.15,53.88 162.74,54.29 v162.32,54.29 | v159,50.97 153.74,50.97 D1.4
  Bottom 0.15: v162.32,54.29 v159,50.97
DP
  Top 0.15: 162.94,54.78 162.94,55.05 163.22,55.33 163.71,55.33 J2.B6 | 162.94,54.78 162.94,54.64 163.22,54.36 163.71,54.36 J2.A6 | 162.94,54.78 155.33,54.78 153.74,53.18 153.74,52.84 D1.6
EPD_3V3  (via drill 0.3)
  Top 0.3: EPD_3V3.TP 91.34,19.25 91.34,23.61 90.86,24.1 88.5,24.1 85.8,26.8 85.8,26.87 85.66,27.01 83.79,27.01 L1.2 83.72,26.87 83.72,23.48 82.13,21.88 81.09,21.88 80.47,22.51 C7.1 80.33,22.58 v79.71,21.95 | J1.16 83.65,15.51 84.07,15.51 J1.15 84.14,15.65 84.14,16.48 84.48,16.83 | 84.48,16.83 85.39,16.83 86.77,18.21 87.81,18.21 88.64,19.04 89.06,19.04 EPD_C5.1 | v56.09,21.95 46.6,12.46 Q2.2 | v84.42,17.17 84.42,16.97 84.48,16.83
  Bottom 0.3: v56.09,21.95 v79.71,21.95 79.78,21.81 v84.42,17.17
EPD_3V3_C  (via drill 0.3)
  Top 0.3: R_CL1.2 43.21,6.51 46.54,9.83 46.54,10.53 Q2.1 46.47,10.66 46.47,11.29 44.8,12.95 44.8,33.79 v34.49,44.11 | EPD_3V3_C.TP 22.85,68.7 20.22,66.06 20.22,64.89 U2.18 20.29,64.75 20.29,64.4 v20.98,63.71
  Bottom 0.3: v34.49,44.11 20.98,57.62 v20.98,63.71
EPD_BUSY  (via drill 0.3)
  Top 0.15: v87.12,14.68 87.12,15.44 J1.9 | v97.99,14.68 100.62,12.05 EPD_BUSY.TP | v42.17,60.8 13.85,60.8 10.04,64.61 10.04,64.82 U2.26
  Bottom 0.15: v97.99,14.68 v87.12,14.68 87.12,16.07 42.38,60.8 v42.17,60.8
EPD_CS  (via drill 0.3)
  Top 0.15: EPD_CS.TP 23.61,92.52 24.1,92.03 27.49,92.03 R9.1 27.56,91.96 v28.25,91.27 | v38.71,80.81 38.71,73.82 D6.1 | v85.59,14.68 85.59,15.44 J1.12 | v21.05,46.19 20.22,47.02 20.22,47.3 U2.11
  Bottom 0.15: v28.25,91.27 36.25,83.27 | 36.25,83.27 v38.71,80.81 | v85.59,14.68 85.59,16.69 58.66,43.63 23.61,43.63 v21.05,46.19 21.05,46.26 19.18,48.13 19.18,66.2 36.25,83.27
EPD_DC  (via drill 0.3)
  Top 0.15: v84.69,16.27 85.73,16.27 86.08,15.93 86.08,15.51 J1.11 | v13.43,48.48 12.6,47.64 12.6,47.37 U2.5 12.53,47.3 12.53,47.02 11.84,46.33 v11.84,46.19 | v10.87,45.22 10.94,45.15 10.94,43.84 EPD_DC.TP
  Bottom 0.15: v84.69,16.27 83.17,16.27 77.97,21.47 49.31,21.47 27.42,43.35 22.78,43.35 17.66,48.48 v13.43,48.48 | v11.84,46.19 v10.87,45.22
EPD_RST  (via drill 0.3)
  Top 0.15: v86.56,17.24 86.56,15.51 J1.10 | v21.54,63.02 18,63.02 16.41,64.61 16.41,64.82 U2.21 16.41,64.89 16.41,65.09 17.24,65.93 17.24,74.93 EPD_RST.TP
  Bottom 0.15: v86.56,17.24 86.36,17.24 41.06,62.53 22.02,62.53 v21.54,63.02
FLASH_CS  (via drill 0.3)
  Top 0.15: D9.1 25.35,18.7 22.64,21.4 22.64,27.29 R5.1 22.58,27.35 v21.54,28.39 | U1.1 36.01,58.72 33.03,58.72 22.64,48.34 22.23,48.34 21.54,47.64 21.54,47.37 U2.12 21.54,47.3 v21.54,43.14
  Bottom 0.15: v21.54,43.14 v21.54,28.39
GDR
  Top 0.15: R4.1 98.68,17.73 98.47,17.52 92.31,17.52 90.65,15.86 90.65,15.51 J1.2 90.58,15.44 90.58,15.1 88.85,13.37 80.05,13.37 75.76,17.66 75.76,23.34 76.52,24.1 76.52,24.31 Q3.1
GND  (via drill 0.3)
  Top 0.15: J1.17 83.17,15.44 83.17,14.61 83.86,13.92 86.98,13.92 87.6,14.54 87.6,15.44 J1.8 87.67,15.51 v87.67,17.66 | 89.12,21.19 89.12,22.02 90.37,23.27 EPD_C2.2 | 89.12,21.19 89.12,20.43 EPD_C5.2 | EPD_C12.2 81.37,20.64 82.06,20.64 82.34,20.91 EPD_C11.2 82.41,20.91 83.24,20.91 83.38,20.77 EPD_C10.2 83.45,20.77 EPD_C9.2 84.48,20.71 85.39,20.71 EPD_C8.2 85.52,20.64 85.59,20.57 86.42,20.57 EPD_C7.2 86.49,20.5 87.46,20.5 EPD_C6.2 87.46,20.57 87.88,20.98 v87.88,21.19 | v88.85,21.19 89.12,21.19 | J1.MP2 78.67,13.02 92.1,13.02 J1.MP1 92.17,13.02 95.08,13.02 99.37,17.31 99.37,18.42 98.75,19.04 R4.2 | C7.2 81.65,22.64 81.65,29.5 82.13,29.98 84.28,29.98 84.9,29.36 84.9,28.39 D3.1 84.97,28.32 85.11,28.32 88.74,24.69 | C8.2 93.83,52.7 88.71,52.7 87.25,51.24 87.25,50.9 U3.13 87.25,50.83 87.25,46.95 89.47,44.74 89.47,43.7 89.33,43.56 88.36,43.56 88.16,43.77 88.16,44.74 88.02,44.87 87.12,44.87 86.98,44.74 | SJ1.1 127.77,14.75 125.76,14.75 R2.1 125.69,14.75 121.53,14.75 110.31,25.97 | R4.2 98.68,19.11 97.92,19.88 93.76,19.88 93.21,20.43 92.93,20.43 EPD_C1.2 92.86,20.5 92.86,22.64 91,24.52 88.92,24.52 88.74,24.69 | 102.7,25.97 102.7,23.2 98.68,19.18 R4.2 | 102.7,25.97 102.7,29.15 SENSOR2.1 102.63,29.09 96.47,35.25 96.47,42.73 | 96.47,42.73 96.47,50.97 C10_SUPERCAP.1 | 102.7,25.97 110.31,25.97 | 86.98,44.74 86.98,43.7 87.95,42.73 96.47,42.73 | v88.71,24.65 88.74,24.69 | J2.MP2 168.21,59.69 164.4,59.69 J2.MP4 163.78,59.14 163.78,57.96 J2.A12 163.78,57.89 163.78,57.69 J2.B1 163.71,57.62 163.01,57.62 v162.81,57.41 | 162.25,52.49 155.54,52.49 R2-USB1.1 | 162.25,52.49 163.15,51.59 163.71,51.59 J2.B12 163.78,51.52 163.78,51.24 J2.A1 163.78,51.18 163.78,50.21 164.4,49.58 J2.MP3
  Top 0.15: v162.81,53.12 162.25,52.56 162.25,52.49 | J3.1 165.09,17.73 165.37,17.73 165.92,18.28 165.92,29.36 161.63,33.66 161.63,46.74 164.33,49.44 J2.MP3 | J2.MP1 168.21,49.51 164.4,49.51 J2.MP3 | R1PWRUSB.1 128.87,64.19 131.23,61.84 131.23,60.52 C1_BAT1.2 131.37,60.52 137.46,54.43 | 136.91,53.25 136.91,53.88 137.46,54.43 | 136.91,53.25 136.91,47.51 C2_BAT.2 | 137.46,54.43 137.81,54.78 IC4.2 137.46,54.43 | MCP73831.2 127.42,40.1 131.57,40.1 133.24,38.43 C3.- 133.31,38.43 145.08,38.43 | R2-USB.2 148.68,50.69 149.79,50.69 150.97,51.87 151.17,51.87 D1.2 151.24,51.94 151.59,51.94 v154.43,54.78 | 145.08,44.6 148.33,44.6 148.54,44.39 C4_USB.2 148.33,44.67 148.61,44.94 148.61,50.62 R2-USB.2 | 145.08,44.6 142.45,44.6 R2_BAT.2 | 145.08,44.6 145.08,38.43 | 145.08,38.43 145.08,36.49 C5_USB.2 | 136.91,53.25 140.85,53.25 144.04,56.44 144.94,56.44 147.92,53.46 147.92,51.52 148.68,50.76 R2-USB.2 | U4.9 117.66,55.26 117.52,55.26 116.96,54.71 116.96,54.29 U4.1 116.89,54.22 116.89,49.31 107.89,40.3 C1_BAT.2 107.82,40.23 107.82,33.79 105.67,31.65 SENSOR2.5 105.81,31.72 106.44,31.09 106.44,30.47 105.95,29.98 SENSOR2.7 105.67,29.92 105.95,29.92 107.89,27.98 110.31,27.98 | U4.9 117.72,55.26 117.86,55.26 118.42,54.71 118.42,54.29 U4.4 118.49,54.22 119.46,53.25 136.91,53.25 | U4.9 117.93,55.26 117.93,56.23 U4.6 117.93,56.3 117.93,56.58 117.38,57.13 116.2,57.13 113.22,60.11 113.08,60.11 C1_BAT2.2 | 110.31,27.98 114.89,27.98 C2.2 114.95,27.91 120.77,22.09 130.68,22.09 C1.2 | v110.31,26.18 110.31,25.97 | v110.31,27.91 110.31,27.98 | BOOT_BUTTON.1 47.3,108.24 50.69,108.24 BOOT_BUTTON.2 50.76,108.17 52.08,108.17 C6.2 52.15,108.17 59.62,108.17 61.42,109.97 67.8,109.97 68.14,109.62 68.14,108.58 67.52,107.96 C10.2 65.86,107.89 65.72,107.75 CHANGE_BUTTON.2 65.65,107.68 64.4,107.68
  Top 0.15: 64.4,107.68 62.26,107.68 CHANGE_BUTTON.1 | U1.4 36.08,54.98 38.09,54.98 39.89,56.78 U1.9 39.96,56.85 40.16,56.85 41.79,58.48 | 41.69,72.3 51.38,72.3 58.17,79.08 58.17,79.92 IC1.3 58.24,79.98 62.19,79.98 63.64,81.44 C_DELAY.2 63.71,81.51 64.4,82.2 64.4,107.68 | 41.69,72.3 D6.2 | v42.03,58.72 41.79,58.48 | 41.69,72.3 v41.69,61.29 | 16.2,85.25 17.73,85.25 18.63,84.35 GND.TP 18.7,84.35 20.77,86.42 23.27,86.42 GND_1.TP | 16.2,85.25 15.44,85.25 J4.G1 15.37,85.25 14.2,85.25 11.08,82.13 7.48,82.13 | J4.P6 4.85,92.52 13.85,92.52 15.37,91 J4.G2 15.44,90.92 16.2,90.16 16.2,85.25 | C5.2 28.18,107.96 25.97,107.96 25.76,108.17 RESET_BUTTON.2 25.69,108.24 22.23,108.24 RESET_BUTTON.1 22.16,108.24 10.18,108.24 9.83,108.58 8.93,108.58 8.66,108.31 8.66,101.94 6.37,99.65 C9.2 6.3,99.58 2.15,95.43 J4.G4 2.15,95.36 1.18,94.39 1.18,82.27 J4.G3 1.25,82.27 1.39,82.13 7.48,82.13 | D11.2 11.49,38.92 12.19,38.23 12.19,33.45 11.77,33.03 9.97,33.03 7.96,31.02 7.76,31.02 D8.2 8.17,31.3 v7.62,31.86 | D12.2 28.18,24.31 28.88,23.61 28.88,20.84 25.97,17.94 24.79,17.94 24.1,18.63 23.96,18.63 D9.2 23.82,18.63 18.07,18.63 6.51,30.19 6.51,31.86 | U2.29_3 11.98,55.88 13.16,55.88 U2.29_6 | U2.29_1 11.98,53.39 11.98,54.57 U2.29_2 | U2.29_1 12.05,53.39 13.16,53.39 U2.29_4 13.3,53.32 14.4,53.32 U2.29_7 | U2.29_2 12.05,54.57 13.16,54.57 U2.29_5 13.23,54.64 14.4,54.64 U2.29_8 14.47,54.64 14.47,55.82 U2.29_9 14.54,55.82 20.84,55.82 v23.75,58.72 | U2.29_3 11.98,55.82 11.98,54.64 U2.29_2 | U2.29_3 11.98,55.95 7.55,60.39 7.55,64.82 U2.28 7.48,64.89 7.48,82.13 | U2.29_1 11.91,53.32 7.55,48.96 7.55,47.37 U2.1 7.48,47.3 7.48,46.95 5.54,45.01 5.54,43.28 D10.2 5.54,43.21 6.92,41.83 6.92,38.5 6.51,38.09 6.51,31.86
  Top 0.15: v6.37,31.86 6.51,31.86 | 86.98,44.74 64.61,44.74 52.35,56.99 43.28,56.99 41.79,58.48
  Bottom 0.15: v87.67,17.66 87.67,20.91 87.88,21.12 v87.88,21.19 v88.85,21.19 88.71,21.26 v88.71,24.65 | v162.81,53.12 162.81,54.78 | 162.81,54.78 v162.81,57.41 | v154.43,54.78 162.81,54.78 | v110.31,27.91 v110.31,26.18 | v41.69,61.29 41.69,60.66 42.03,60.32 v42.03,58.72 v23.75,58.72 | v6.37,31.86 v7.62,31.86
  pour Top: -8.24,-5.14 174.64,-5.14 174.64,116.49 -8.24,116.49 -8.24,114.46 -8.24,114.45 -8.24,114.45 -8.24,114.39 -8.24,114.38
  pour Bottom: -8.19,-4.99 173.56,-4.99 173.56,116.19 -8.19,116.19
  pour Top: 9.57,8.7 134.84,8.7 134.84,82.13 10.72,82.13
  pour Bottom: 13.86,6.6 13.87,6.57 13.87,5.94 151,5.94 151,71.34 11.11,71.34 10.63,6.95 10.63,5.94 11.65,5.94 11.65,7.26 11.66,7.29 11.68,7.31 11.71,7.32 14.5,7.32 14.53,7.31 14.55,7.29 14.56,7.26 14.56,7.23 14.55,7.2 14.53,7.18 14.5,7.17 12.49,7.17 12.49,6.63 13.81,6.63 13.84,6.62
GPIO8
  Top 0.15: R1.2 18.91,45.43 18.91,47.3 U2.10
I2C_PW  (via drill 0.3)
  Top 0.3: 137.05,20.77 130.74,20.77 C1.1 130.61,20.84 120.77,20.84 115.02,26.59 C2.1 114.89,26.73 108.1,26.73 105.67,29.15 SENSOR2.8 105.54,29.22 105.26,29.22 104.57,29.92 | 137.05,20.77 141.13,24.86 R2-PINH.2 | R1_PINH.2 143.76,12.67 143.76,13.99 137.12,20.64 137.05,20.77 | 104.57,29.92 102.77,29.92 SENSOR2.2 102.63,30.05 102.35,30.05 v101.87,30.54 | SENSOR2.6 105.61,30.75 105.26,30.75 104.57,30.05 104.57,29.92 | v22.37,63.57 21.54,64.4 21.54,64.82 U2.17
  Bottom 0.3: v22.37,63.57 43.56,63.57 76.59,30.54 v101.87,30.54
INT_RTC
  Top 0.15: INT_RTC.TP 98.13,56.72 96.47,58.38 94.53,58.38 R1_PINH1.1 94.46,58.45 91.41,61.49 89.47,61.49 88.57,60.59 88.57,60.25 U3.3 88.5,60.18 88.5,59.9 87.53,58.93 81.85,58.93 80.47,60.32 29.09,60.32 16.41,47.64 16.41,47.37 U2.8
IO/BOOT
  Top 0.15: C6.1 52.08,109.48 50.97,109.48 50.76,109.69 BOOT_BUTTON.3 50.69,109.69 47.3,109.69 BOOT_BUTTON.4 47.09,109.55 46.19,109.55 | 46.19,109.55 45.57,109.55 R_BOOT.2 | 46.19,109.55 46.19,107.34 37.95,99.1 37.95,82.2 24.03,68.28 24.03,64.89 U2.15
IO/CHANGE
  Top 0.15: C10.1 67.45,109.21 CHANGE_BUTTON.3 65.65,109.21 62.26,109.21 CHANGE_BUTTON.4 62.19,109.21 56.44,103.46 56.44,102.7 R_CHANGE.2 56.3,102.7 53.6,102.7 38.23,87.32 38.23,76.31 24.45,62.53 15.93,62.53 13.85,64.61 U2.23
MISO  (via drill 0.3)
  Top 0.15: v5.96,96.47 5.96,94.32 5.33,93.69 5.05,93.69 J4.P7 | v2.98,99.44 2.98,100.34 2.56,100.76 MISO.TP | D12.1 28.12,22.85 27.42,23.55 27.42,30.4 R8.1 27.49,30.4 27.91,30.4 v28.12,30.61 | v21.88,57.48 15.86,57.48 8.79,64.54 8.79,64.82 U2.27 8.73,64.89 8.73,65.23 v7.96,66 | U1.2 36.01,57.48 v32.41,57.48 32.41,57.41 28.88,53.88 v28.88,41.27
  Bottom 0.15: v2.98,99.44 v5.96,96.47 5.96,89.68 7.96,87.67 v7.96,66 | v21.88,57.48 v32.41,57.48 | v28.12,30.61 28.12,37.74 29.15,38.78 29.15,41 v28.88,41.27
MOSI  (via drill 0.3)
  Top 0.15: R7.1 11.29,34.97 11.29,37.33 11.43,37.46 D11.1 11.43,37.53 10.8,38.16 v10.8,41.55 | v15.37,46.12 15.17,46.33 15.17,47.3 U2.7 | v7.48,87.53 5.82,89.19 5.05,89.19 J4.P3 | v6.44,38.64 4.09,36.29 MOSI.TP | v84.35,14.68 84.55,14.89 84.55,15.44 J1.14 | v75.28,20.98 75.28,23.48 44.25,54.5 | 44.25,54.5 U1.5 | 44.25,54.5 v28.67,38.92
  Bottom 0.15: v7.48,87.53 7.48,43.42 9.35,41.55 | 9.35,41.55 v10.8,41.55 v15.37,46.12 19.18,46.12 26.38,38.92 v28.67,38.92 | 9.35,41.55 v6.44,38.64 | v84.35,14.68 78.05,20.98 v75.28,20.98
N$2
  Top 0.15: R2-USB.1 148.68,52.01 148.68,52.63 152.35,56.3 163.71,56.3 J2.B5
N$3
  Top 0.15: R2-USB1.2 155.54,53.81 162.74,53.81 163.15,53.39 163.71,53.39 J2.A5
N$4
  Top 0.15: 134.83,60.52 132.61,60.52 C1_BAT1.1 | 134.83,60.52 137.88,63.57 D2.1 | 138.57,55.05 138.57,54.36 138.01,53.81 137.88,53.81 IC4.1 | 138.57,55.05 138.01,55.61 137.88,55.61 IC4.3 137.81,55.68 134.83,58.66 134.83,60.52 | Q1.2 143.49,57.82 141.41,57.82 138.64,55.05 138.57,55.05
N$5
  Top 0.15: J1.24 79.64,15.51 79.64,17.59 81.3,19.25 EPD_C12.1
N$6
  Top 0.15: GHC_LED.C 118.62,43.63 118.62,39.06 116.34,36.77 R1_BAT.2
N$7
  Top 0.15: C4.1 91.55,28.74 88.85,28.74 88.5,28.39 D3.2 88.43,28.32 88.43,26.38 D4.1
N$9
  Top 0.15: R1_BAT.1 116.34,35.46 117.38,35.46 122.92,41 127.35,41 MCP73831.1
N$10
  Top 0.15: R2_BAT.1 141.06,44.6 133.58,44.6 130.05,41.06 MCP73831.5
N$11
  Top 0.15: IC1.5 56.37,82.75 57.2,82.75 57.89,83.45 63.02,83.45 63.64,82.82 C_DELAY.1
N$12
  Top 0.15: J1.22 80.68,15.51 80.68,16.69 83.38,19.39 EPD_C10.1
N$14
  Top 0.15: J1.20 81.65,15.51 81.65,15.86 84.69,18.91 84.97,18.91 85.39,19.32 EPD_C8.1
N$15
  Top 0.15: J1.19 82.13,15.51 82.13,15.93 84.83,18.63 85.87,18.63 86.42,19.18 EPD_C7.1
N$16
  Top 0.15: J1.18 82.68,15.51 82.68,16.07 84.97,18.35 86.36,18.35 86.7,18.7 87.05,18.7 87.46,19.11 EPD_C6.1
N$18
  Top 0.15: J1.4 89.68,15.51 89.68,15.93 91.83,18.07 91.96,18.07 92.86,18.97 92.86,19.18 EPD_C1.1
N$19
  Top 0.15: J1.5 89.12,15.51 89.12,18 90.09,18.97 90.09,21.74 90.37,22.02 EPD_C2.1
N$24
  Top 0.15: R_CAPACITOR.1 88.85,44.25 88.85,44.46 87.6,45.7 78.53,45.7 D7.1
PREVGH
  Top 0.15: EPD_C9.1 84.42,19.46 84.42,19.32 81.16,16.07 81.16,15.51 J1.21 81.09,15.44 81.09,15.1 80.81,14.82 79.43,14.82 79.22,15.03 79.22,22.64 79.92,23.34 79.98,23.34 80.95,24.31 80.95,29.22 83.17,31.44 83.17,32.27 D5.1
PREVGL
  Top 0.15: J1.23 80.12,15.51 80.12,16.97 82.34,19.18 82.34,19.6 EPD_C11.1 82.41,19.67 82.82,20.08 84.9,20.08 85.04,19.94 86.01,19.94 86.08,19.88 88.09,19.88 88.36,20.15 88.36,21.33 84.97,24.72 84.97,26.32 D4.2
RESE
  Top 0.15: R3.1 92.73,17.8 92.03,17.8 90.16,15.93 90.16,15.51 J1.3 90.09,15.44 90.09,15.1 88.64,13.64 80.19,13.64 76.59,17.24 76.59,22.99 Q3.2
RESE'  (via drill 0.3)
  Top 0.15: v99.37,20.5 94.25,20.5 R3.2 | v125,14.13 125.69,13.43 R2.2 125.76,13.37 125.83,13.3 127.77,13.3 SJ1.2
  Bottom 0.15: v99.37,20.5 118.62,20.5 v125,14.13
RESET  (via drill 0.3)
  Top 0.15: R_RESET.2 8.1,107.96 8.1,108.17 9.63,109.69 22.16,109.69 RESET_BUTTON.4 25.69,109.69 RESET_BUTTON.3 25.76,109.69 27.77,109.69 28.18,109.28 C5.1 28.25,109.21 29.09,108.38 v29.09,108.03 | v56.3,80.81 56.3,79.98 IC1.1 | v11.77,52.56 10.04,50.83 10.04,47.37 U2.3
  Bottom 0.15: v29.09,108.03 36.74,100.38 | 36.74,100.38 v56.3,80.81 | v11.77,52.56 11.77,75.41 36.74,100.38
RTC_RST  (via drill 0.3)
  Top 0.15: v24.31,63.02 22.78,64.54 22.78,64.82 U2.16 | v43.35,63.02 84.76,63.02 87.19,60.59 87.19,60.25 U3.4
  Bottom 0.15: v43.35,63.02 v24.31,63.02
RX
  Top 0.15: U2.24 12.6,64.89 12.6,65.51 14.82,67.73 RX.TP
SCK  (via drill 0.3)
  Top 0.15: SCK.TP 19.94,33.03 19.94,34.14 16.97,37.12 16.97,37.33 R6.1 16.97,37.4 16.97,41.06 19.53,43.63 19.53,44.53 19.25,44.8 16.07,44.8 13.85,47.02 U2.6 13.85,47.09 v12.95,46.19 | v8.24,43.28 D10.1 | v10.46,86.15 5.19,91.41 5.05,91.41 J4.P5 | v83.72,14.68 84.21,14.2 84.48,14.2 85.11,14.82 85.11,15.44 J1.13 | v77.91,20.5 77.91,24.03 45.77,56.16 43.84,56.16 U1.6 43.84,56.09 43.14,55.4 43.14,54.22 28.67,39.75 v28.67,39.54
  Bottom 0.15: v8.24,43.28 10.04,43.28 12.78,46.02 | 12.78,46.02 v12.95,46.19 14.82,46.19 15.23,46.6 19.11,46.6 26.18,39.54 v28.67,39.54 | v10.46,86.15 10.46,48.34 12.78,46.02 | v77.91,20.5 v83.72,14.68
SCL  (via drill 0.3)
  Top 0.15: J3.4 165.02,20.77 160.24,25.55 140.65,25.55 140.02,24.93 139.88,24.93 R2-PINH.1 139.82,24.93 v118.56,24.93 | 97.99,54.15 100.69,56.85 117.17,56.85 117.38,56.65 117.38,56.3 U4.7 | 97.99,54.15 95.7,54.15 94.53,52.98 94.53,52.28 94.25,52.01 92.17,52.01 91.06,50.9 U3.16 91.2,51.11 90.09,52.22 v89.26,52.22 | 97.99,54.15 97.99,54.08 102.7,49.38 102.7,31.65 SENSOR2.4 102.77,31.51 102.91,31.37 v103.67,31.37 | v20.22,63.71 18.56,63.71 17.73,64.54 17.73,64.82 U2.20
  Bottom 0.15: v20.22,63.71 20.36,63.71 20.84,64.19 43.49,64.19 55.47,52.22 v89.26,52.22 | v118.56,24.93 110.11,24.93 v103.67,31.37
SDA  (via drill 0.3)
  Top 0.15: v19.67,66 18.97,65.3 18.97,64.89 U2.19 | v89.75,49.51 89.75,50.83 U3.15 | J3.3 165.02,19.67 156.16,19.67 147.85,11.36 143.83,11.36 R1_PINH.1 143.76,11.36 124.3,11.36 v110.18,25.48 | 104.15,31.23 104.15,43.14 116.89,55.88 116.89,56.23 U4.8 | 104.15,31.23 103.74,30.82 102.77,30.82 SENSOR2.3 | 104.15,31.23 v104.43,31.23
  Bottom 0.15: v19.67,66 42.1,66 55.4,52.7 89.4,52.7 89.75,52.35 v89.75,49.51 89.75,45.98 104.43,31.3 v104.43,31.23 v110.18,25.48
SRC
  Top 0.15: Q3.3 78.67,23.68 78.67,26.52 79.15,27.01 L1.1 79.22,27.08 79.22,31.86 79.64,32.27 D5.2 79.71,32.34 80.33,32.96 83.86,32.96 86.7,30.12 91.55,30.12 C4.2
SS_SD  (via drill 0.3)
  Top 0.15: 12.46,31.99 10.18,31.99 9.21,31.02 D8.1 | 12.46,31.99 15.58,31.99 R10.1 | 12.46,31.99 12.46,44.04 11.36,45.15 11.36,47.3 U2.4 11.29,47.37 10.94,47.71 v10.94,48.48 | v10.94,82.61 J4.P2
  Bottom 0.15: v10.94,48.48 v10.94,82.61
TX
  Top 0.15: U2.25 11.36,64.89 11.36,68.77 TX.TP
USB_D+  (via drill 0.3)
  Top 0.15: v149.51,52.84 151.17,52.84 D1.1 | v48.34,54.22 v54.5,54.22 | v28.05,51.38 24.03,47.37 U2.14
  Bottom 0.15: v149.51,52.84 135.73,52.84 134.34,54.22 v54.5,54.22 | v48.34,54.22 30.89,54.22 v28.05,51.38
USB_D-  (via drill 0.3)
  Top 0.15: v150.27,50.55 150.62,50.9 151.17,50.9 D1.3 | v47.85,54.71 v54.02,54.71 | v27.29,52.15 22.78,47.64 22.78,47.37 U2.13
  Bottom 0.15: v150.27,50.55 150.27,52.7 148.26,54.71 v54.02,54.71 | v47.85,54.71 29.85,54.71 v27.29,52.15
VBAT
  Top 0.3: 127.42,36.08 127.42,39.13 MCP73831.3 | 127.42,36.08 128.18,35.32 VBAT.TP | U4.2 117.45,54.29 117.93,54.29 U4.3 118,54.15 118,53.81 125.55,46.26 | Q1.3 144.46,55.68 144.46,53.74 136.91,46.19 C2_BAT.1 136.77,46.26 125.55,46.26 | 127.42,36.08 127.28,36.01 118.49,36.01 117.24,34.76 115.72,34.76 115.51,34.97 115.51,35.87 115.72,36.08 116.83,36.08 125.48,44.74 125.48,46.12 125.55,46.26
VBUS
  Top 0.3: C5_USB.1 146.32,36.49 146.32,40.79 148.54,43 C4_USB.1 148.68,43.14 152.14,46.6 152.14,50.69 153.32,51.87 153.67,51.87 D1.5 | PFMF.050.1.2 158.1,35.59 147.29,35.59 146.46,36.42 C5_USB.1 | GHC_LED.A 118.62,45.15 113.99,45.15 109.14,40.3 C1_BAT.1 109.42,40.37 118,31.79 122.78,31.79 VBUS.TP 122.92,31.72 126.52,31.72 129.98,35.18 129.98,35.73 | 129.98,35.73 129.98,39.13 MCP73831.4 | 129.98,35.73 145.49,35.73 146.19,36.42 C5_USB.1
VRTC
  Top 0.3: C10_SUPERCAP.2 96.4,53.18 94.67,51.45 93.9,51.45 C8.1 93.76,51.38 93.21,51.38 90.51,48.68 90.03,48.68 89.89,48.61 | 89.89,48.61 89.89,43.56 89.47,43.14 88.22,43.14 87.6,43.77 87.6,44.18 R_CAPACITOR.2 | 89.89,48.61 88.57,49.93 88.57,50.83 U3.14
VUSB
  Top 0.3: J2.A4 163.78,52.08 163.78,52.28 J2.B9 163.91,52.35 164.4,52.35 165.02,52.98 | J2.B4 163.78,56.85 163.78,57.13 J2.A9 | 165.02,52.98 165.02,56.23 164.47,56.78 163.91,56.78 J2.B4 | R1PWRUSB.2 127.56,64.26 128.32,65.03 138.57,65.03 139.95,63.64 D2.2 140.02,63.43 145.43,58.03 145.43,57.89 Q1.1 145.56,57.76 146.46,56.85 163.64,56.85 J2.B4 | PFMF.050.1.1 162.67,35.59 162.67,41.34 169.59,48.27 169.59,50.69 167.38,52.91 165.16,52.91 165.02,52.98